# Altium PCB PCB2.PcbDoc
Units mm, origin at the board's own origin, x right, y up, seen from the top; angles counter-clockwise.
Board outline 29 x 14 mm, 2 copper layers (Top Layer, Bottom Layer), stack 1.569 mm thick; 11 components, 6 nets, 26 pads, 8 vias.
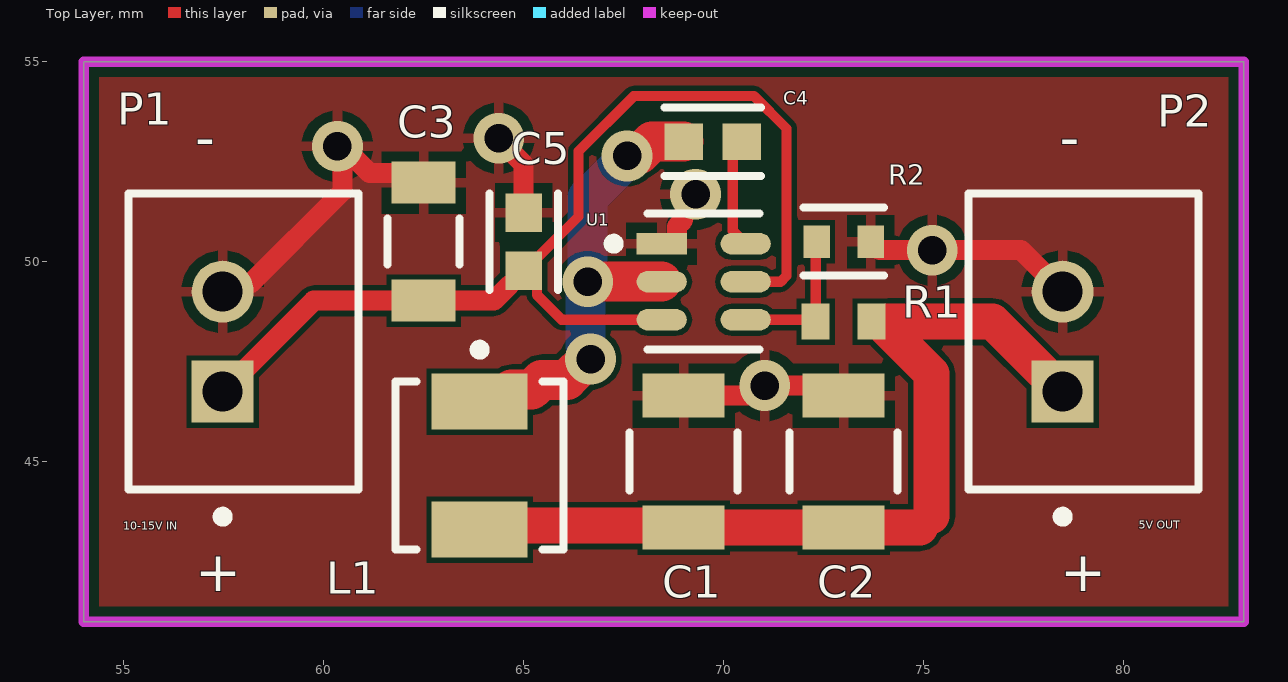
[diagram p0: Top Layer view]
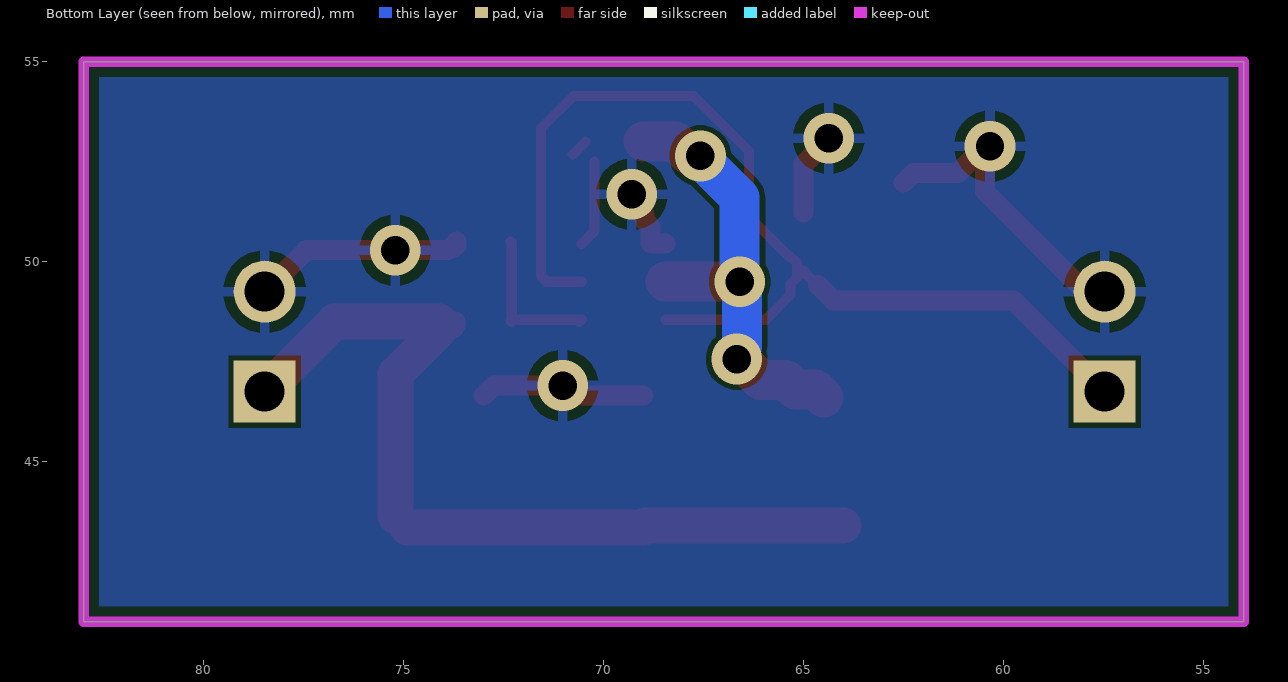
[diagram p1: Bottom Layer view, seen from below]
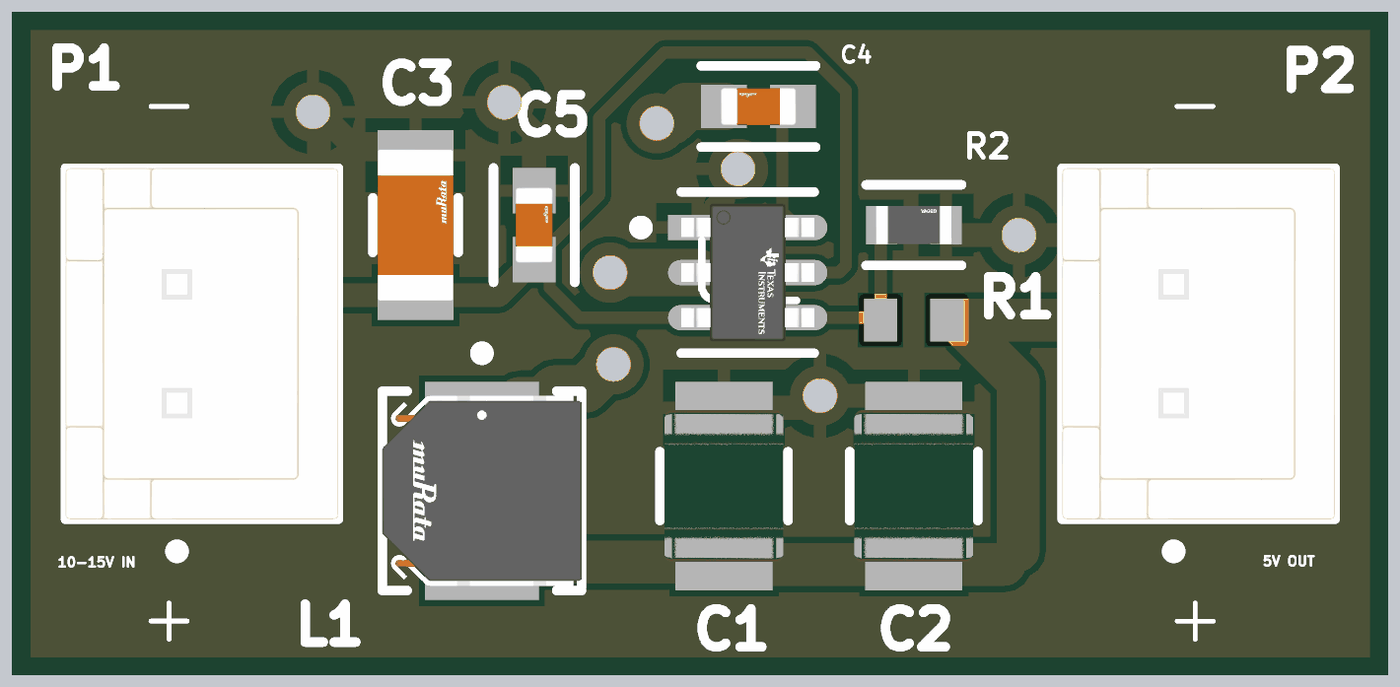
[diagram p2: 3D render of the assembled board from above, using the file's embedded part models]

## Layer stack, top to bottom
Top Solder: solder mask 0.0254, SM-001, Dk 4
Top Layer: signal copper 0.035
Dielectric 1: core 1.4986, Core-043, Dk 4.3
Bottom Layer: signal copper 0.035
Bottom Solder: solder mask 0.0254, SM-001, Dk 4

## Board outline
54,41 54,55 83,55 83,41

## Design rules (kind name [scope] priority, off if disabled: settings)
AssemblyTestPointUsage [All] p1: isadvanced=TRUE
AssemblyTestpoint [All] p1: isadvanced=TRUE testpointundercomponent=TRUE minsize=1.016 maxsize=2.54 preferedsize=1.524 minholesize=0 maxholesize=1.016 preferedholesize=0.813 testpointgrid=0.025 usegrid=TRUE gridtolerance=0 allowsidetop=TRUE allowsidebottom=TRUE
Clearance Clearance_1 [OnMid vs OnMid] p1: gap=0.127 ignorepadtopadclearanceinfootprint=FALSE sourcerule=41 cellrowname=All cellrowtype=0 cellcolname=All cellcoltype=0 innerlayers=TRUE
Clearance Clearance_2 [(ExistsOnLayer('Top Layer') Or ExistsOnLayer('Bottom Layer')) vs (ExistsOnLayer('Top Layer') Or ExistsOnLayer('Bottom Layer'))] p2: gap=0.127 ignorepadtopadclearanceinfootprint=FALSE sourcerule=41 cellrowname=All cellrowtype=0 cellcolname=All cellcoltype=0 outerlayers=TRUE
Clearance [All] p3: gap=0.254 ignorepadtopadclearanceinfootprint=FALSE ismatrix=TRUE
ComponentClearance [All] p1: isadvanced=TRUE gap=0.254 collisioncheckmode=3 verticalgap=0.254 showdistances=FALSE
FabricationTestPointUsage [All] p1: isadvanced=TRUE valid=0 allowmultiple=FALSE
FabricationTestpoint [All] p1: isadvanced=TRUE side=3 testpointundercomponent=TRUE minsize=1.016 maxsize=2.54 preferedsize=1.524 minholesize=0 maxholesize=1.016 preferedholesize=0.813 testpointgrid=0.025 allowsidetop=TRUE allowsidebottom=TRUE usegrid=TRUE gridtolerance=0
FanoutControl Fanout_BGA [IsBGA] p1: isadvanced=TRUE bgadir=Out bgaviamode=Centered fanoutstyle=Auto fanoutdirection=Alternating viagrid=0.025 // Fanout_BGA (Default Rule)
FanoutControl Fanout_LCC [IsLCC] p2: isadvanced=TRUE bgadir=Out bgaviamode=Centered fanoutstyle=Auto fanoutdirection=Alternating viagrid=0.025 // Fanout_LCC (Default Rule)
FanoutControl Fanout_SOIC [IsSOIC] p3: isadvanced=TRUE bgadir=Out bgaviamode=Centered fanoutstyle=Auto fanoutdirection=Alternating viagrid=0.025 // Fanout_SOIC (Default Rule)
FanoutControl Fanout_Small [(CompPinCount < 5)] p4: isadvanced=TRUE bgadir=Out bgaviamode=Centered fanoutstyle=Auto fanoutdirection=OutThenIn viagrid=0.025 // Fanout_Small (Default Rule)
FanoutControl Fanout_Default [All] p5: isadvanced=TRUE bgadir=Out bgaviamode=Centered fanoutstyle=Auto fanoutdirection=Alternating viagrid=0.025 // Fanout_Default (Default Rule)
Height [All] p1: isadvanced=TRUE minheight=0 maxheight=25.4 prefheight=12.7
HoleSize [All] p1: isadvanced=TRUE absolutevalues=TRUE maxlimit=2.54 minlimit=0.025 maxpercent=80.000 minpercent=20.000
HoleToHoleClearance [All] p1: isadvanced=TRUE gap=0.254 allowstackedmicrovias=TRUE
LayerPairs [All] p1: isadvanced=TRUE enforce=TRUE
MinimumSolderMaskSliver [All] p1: isadvanced=TRUE minsoldermaskwidth=0.254
NetAntennae [All] p1: isadvanced=TRUE netantennaetolerance=0
PasteMaskExpansion [All] p1: isadvanced=TRUE expansion=0
PlaneClearance [All] p1: isadvanced=TRUE clearance=0.508
PlaneConnect [All] p1: isadvanced=TRUE planeconnectstyle=Relief reliefexpansion=0.508 reliefentries=4 reliefconductorwidth=0.254 reliefairgap=0.254
PolygonConnect [All] p1: connectstyle=Relief reliefconductorwidth=0.254 reliefentries=4 polygonreliefangle="90 Angle" airgapwidth=0.254
RoutingCorners [All] p1: isadvanced=TRUE cornerstyle=45-Degree minsetback=2.54 maxsetback=2.54
RoutingPriority [All] p1: isadvanced=TRUE routingpriority=0
RoutingVias [All] p1: holewidth=0.711 width=1.27 viastyle="Through Hole" minholewidth=0.711 minwidth=1.27 maxholewidth=0.711 maxwidth=1.27
ShortCircuit [All] p1: isadvanced=TRUE allowed=FALSE
SilkToSilkClearance [All] p1: isadvanced=TRUE silktosilkclearance=0.254
SilkToSolderMaskClearance [IsPad] p1: isadvanced=TRUE minsilkscreentomaskgap=0.254 clearancetoexposedcopper=TRUE
SolderMaskExpansion [All] p1: isadvanced=TRUE expansion=0.102 istentingtop=FALSE
SupplyNets "Schematic Supply Nets" [InNet('GND')] p1: isadvanced=TRUE voltage=0.000
UnRoutedNet [All] p1: isadvanced=TRUE
UnpouredPolygon [All] p1: isadvanced=TRUE
Width MaxMinWidth_1 [InNet('VIN')] p1: maxlimit=0.5 minlimit=0.254 preferedwidth=0.5 minimp=50.000000 maximp=50.000000 favimp=50.000000
Width MaxMinWidth_2 [InNet('SW')] p2: maxlimit=1 minlimit=0.254 preferedwidth=1 minimp=50.000000 maximp=50.000000 favimp=50.000000
Width MaxMinWidth_3 [InNet('VOUT')] p3: maxlimit=1 minlimit=0.254 preferedwidth=1 minimp=50.000000 maximp=50.000000 favimp=50.000000
Width MaxMinWidth_4 [InNet('GND')] p4: maxlimit=0.5 minlimit=0.5 preferedwidth=0.5 minimp=50.000000 maximp=50.000000 favimp=50.000000
Width [All] p5: maxlimit=0.254 minlimit=0.254 preferedwidth=0.254
4 further rules are at their usual default settings.

## Classes and differential pairs
component class Sheet1: C1 C2 C3 C4 C5 L1 P1 P2 R1 R2

## Components (designator, comment, footprint, x,y, rotation, side; value= is the part's Value field where it differs from the comment)
C1 "GRM32ER61E226KE15L" FP-GRM32-MFG 69,45 r270 top value=22uF
C2 "GRM32ER61E226KE15L" FP-GRM32-MFG 73,45 r270 top value=22uF
C3 "GRM31CR71E106KA12K" FP-GRM31C-0_2-e0_3_0_8-MFG 62.5,50.5 r90 top
C4 "GRM188R72A104KA35D" FP-GRM188-0_1-e0_2_0_5-IPC_B 69.727,53 r180 top
C5 "GRM188R72A104KA35D" FP-GRM188-0_1-e0_2_0_5-IPC_B 65,50.5 r90 top
L1 "FDSD0420-H-4R7M=P3" FP-FDSD0420-MFG 63.9,44.9 r270 top
P1 "B2B-XH-A(LF)(SN)" FP-B2B-XH-A_LF_SN-MFG 58,48 r90 top
P2 "B2B-XH-A(LF)(SN)" FP-B2B-XH-A_LF_SN-MFG 79,48 r90 top
R1 "RC0603FR-0754K9L" RESC1608X55X25NL10T15 73,48.5 r0 top
R2 "RC0603FR-0710KL" FP-RC0603-0_55-IPC_C 73,50.5 r0 top
U1 "TPS562201DDCR" FP-DDC0006A-IPC_C 69.5,49.5 r0 top

## Footprints (in the part's own frame and the unit in brackets; to place one, negate y for a bottom-side part, rotate by r counter-clockwise, add the part's x,y. Pads: shape width x height; smd on the part's side, far side on the other; paste and mask are expansions set on the pad)
FP-B2B-XH-A_LF_SN-MFG [mm]
  rect 1.55x1.55 hole 1 paste-2539.97 mask+0: 1(-1.25,0.525)
  round 1.55 hole 1 paste-2539.97 mask+0: 2(1.25,0.525)
  silkscreen extent -4.5,-2.88 3.7,2.88, body extent -3.8,-2.98 3.8,2.98, height 0.25
FP-DDC0006A-IPC_C [mm]
  rect 1.254x0.532 smd paste+0 mask+0: 1(-1.05,0.95)
  rrect100% 1.254x0.532 smd paste+0 mask+0: 2(-1.05,0) 3(-1.05,-0.95) 4(1.05,-0.95) 5(1.05,0) 6(1.05,0.95)
  silkscreen extent -2.37,-1.7 1.4,1.7, body extent -1.78,-1.55 1.78,1.55, height 0.25
FP-FDSD0420-MFG [mm]
  rect 1.4x2.4 smd paste+0 mask+0: 1(-1.6,0) 2(1.6,0)
  silkscreen extent -3.02,-2.1 2.1,2.1, body extent -2.4,-2.2 2.4,2.2, height 0.25
FP-GRM31C-0_2-e0_3_0_8-MFG [mm]
  rect 1.05x1.6 smd paste+0 mask+0: 1(-1.475,0) 2(1.475,0)
  silkscreen extent -0.58,-0.9 0.58,0.9, body extent -2.1,-1 2.1,1, height 0.25
FP-GRM32-MFG [mm]
  rect 1.1x2.05 smd paste+0 mask+0: 1(-1.65,0) 2(1.65,0)
  silkscreen extent -0.72,-1.35 0.72,1.35, body extent -2.3,-1.45 2.3,1.45, height 0.25
FP-GRM188-0_1-e0_2_0_5-IPC_B [mm]
  rect 0.959x0.912 smd paste+0 mask+0: 1(-0.727,0) 2(0.727,0)
  silkscreen extent -1.21,-0.86 1.21,0.86, body extent -1.46,-0.71 1.46,0.71, height 0.25
FP-RC0603-0_55-IPC_C [mm]
  rect 0.659x0.812 smd paste+0 mask+0: 1(-0.677,0) 2(0.677,0)
  silkscreen extent -1.01,-0.85 1.01,0.85, body extent -1.11,-0.55 1.11,0.55, height 0.25
RESC1608X55X25NL10T15 [mm] "Chip Resistor, 2-Leads, Body 1.60x0.80mm, IPC Medium Density"
  rect 0.7x0.9 smd: 1(-0.7,0) 2(0.7,0)
  body extent -0.85,-0.45 0.85,0.45, height 0.55

## Part data
C1 C2: library part CMP-2000-05458-2, "CAP CER 22UF 25V X5R 1210", Capacitance=22uF, Manufacturer="Murata Electronics North America", Operating Temperature="-55°C ~ 85°C", Package=GRM32, Package / Case="1210 (3225 Metric)", Standard Package=1,000, Temperature="-55°C to +85°C", Temperature Characteristic=X5R, Temperature Range High=+85°C, Temperature Range Low=-55°C, Tolerance=10%, Voltage - Rated=25V, Applications="General Purpose", Automotive=No, Category=Cap, ComponentLink2Description=Datasheet, ComponentLink2URL=https://search.murata.co.jp/Ceramy/image/img/A01X/G101/ENG/GRM32ER61E226KE15-01A.pdf, Device Class L1="Passive Components", Device Class L2=Capacitors, Device Class L3="Ceramic Capacitors", Digikey Description="CAP CER 22UF 25V X5R 1210", Height=2.7mm, Lead Free=Yes, Manufacturer Part Number=GRM32ER61E226KE15L, Material=Ceramic, Mounting Type="Surface Mount, MLCC", Mouser Description="Multilayer Ceramic Capacitors MLCC - SMD/SMT 1210 22uF 25volts X5R 10%", Octopart=https://octopart.com/grm32er61e226ke15l-murata-197441, Other Names=490-3889-2, Packaging="Cut Tape (CT)", Possible Substitute=GRM32ER61E226KE15K, RoHS=TRUE, Size / Dimension="0.126\" L x 0.098\" W (3.20mm x 2.50mm)", Temperature Coefficient=X5R, Thickness (Max)="0.106\" (2.70mm)", Voltage Rating=25V
C3: library part CMP-06035-005515-1, "Chip Multilayer Ceramic Capacitors for General Purpose, 1206, 10uF, X7R, 15%, 10%, 25V", Capacitance=10uF, Case/Package=1206, Dielectric=X7R, Max Operating Temperature=125°C, Min Operating Temperature=-55°C, Tolerance=10%, Voltage=25V, Lead Free="Lead Free", Length=0.126inch, Mount="Surface Mount", Packaging="Tape and Reel", Thickness=0.071inch, Voltage Rating=25V, Voltage Rating (DC)=25V, Width=0.063inch
C4 C5: library part CMP-1035-02595-8, "Chip Multilayer Ceramic Capacitors for General Purpose, 0603, 0.10uF, X7R, 15%, 10%, 100V", Capacitance=100nF, Case Code (Imperial)=0603, Case Code (Metric)=1608, Dielectric=X7R, Max Operating Temperature=125°C, Min Operating Temperature=-55°C, Package Quantity=1, Tolerance=10%, Voltage=100V, Case/Package=0603, Depth=0.8mm, Height=0.8mm, Lead Free="Lead Free", Length=1.6mm, Material=Ceramic, Mount="Surface Mount", Packaging="Tape and Reel", Radiation Hardening=No, REACH SVHC="No SVHC", Termination=SMD/SMT, Thickness=0.035inch, Voltage Rating=100V, Voltage Rating (DC)=100V, Weight=0.000222oz, Width=0.8mm
L1: library part CMP-06042-016333-1, "FIXED IND 4.7UH 2.7A 83 MOHM SMD", Case/Package=Nonstandard, Current Rating=2.7A, DC Resistance (DCR)=83mR, Inductance=4.7uH, Resistor Type=Wirewound, Saturation Current=3.6A, Test Frequency=100kHz, Tolerance=20%, Core Material=Ferrite, Height - Seated (Max)=0.078inch, Length=0.165inch, Max DC Current=2.7A, Mount="Surface Mount", Packaging="Tape and Reel", RoHS Compliant=Yes, Shielding=Shielded, Width=0.165inch
P1 P2: library part CMP-2000-05888-3, "CONN HEADER VERT 2POS 2.5MM", Color=Natural, Contact Resistance=20mR, Current Rating=3A, Housing Color=White, Insulation Resistance=1GR, Max Operating Temperature=85°C, Max Voltage Rating (AC)=250V, Min Operating Temperature=-25°C, Connector Type="Male Pin", Contact Material=Brass, Contact Plating=Tin, Contact Type="Male Pin", Depth=5.75mm, Fastening Type=Detent, Housing Material=Polyamide, Lead Free="Lead Free", Lead Pitch=2.5mm, Length=7.4mm, Max Current Rating=3A, Max Voltage Rating (DC)=250V, Mount="Through Hole", Number of Contacts=2, Number of Positions=2, Number of Rows=1, Orientation=Straight, Packaging=Bulk, Pitch=2.5mm, REACH SVHC="No SVHC", Series=XH, Termination=Solder, Voltage Rating=250V, Voltage Rating (AC)=250V, Wire/Cable Gauge=22AWG
R1: library part CMP-2000-04083-1, Manufacturer=Yageo, Part Number=RC0603FR-0754K9L
R2: library part CMP-2100-03664-2, "RES 10K OHM 1% 1/10W 0603", Case Code (Imperial)=0603, Case Code (Metric)=1608, Max Operating Temperature=155°C, Max Power Dissipation=100mW, Min Operating Temperature=-55°C, Resistance=10kR, Resistance Tolerance=1%, Resistor Type="Thick Film", Temperature Coefficient=100ppm/°C, Voltage Rating=75V, Voltage Rating (DC)=50V, Case/Package=0603, Construction=Rectangular, Depth=0.8mm, Features="Moisture Resistant", Height=0.45mm, Lead Free="Lead Free", Lead Pitch=0.3mm, Length=1.6mm, Military Standard=Not, Number of Pins=2, Number of Terminations=2, Packaging="Tape and Reel", Power Rating=100mW, RoHS Compliant=Yes, Series=RC, Size Code=0603, Termination=SMD/SMT, Tolerance=1%, Weight=7.1E-05oz, Width=0.8mm
U1: library part CMP-031-00006-1, "Buck Yes 580KHz Adjustable 1 7V 768mV 17V 4.5V SOT-23-THIN SMD mount 1.1mm(height)", Case/Package=SOT, Max Operating Temperature=125°C, Max Supply Voltage=17V, Min Operating Temperature=-40°C, Min Supply Voltage=4.5V, Mounting Technology="Surface Mount", Pins=6

## Via types
v1: diameter 1.27, hole 0.712, Top Layer to Bottom Layer, tented both sides, 7 vias
v2: diameter 1.27, hole 0.711, Top Layer to Bottom Layer, tented both sides, 1 vias

## Nets (pads, with @x,y where several pads share a name; then routed paths per layer and width w, separated by ;. In a path a pad name is that pad's centre, name@x,y a point inside that pad or via, vN(x,y) a via of type N, cw(c..) or ccw(c..) an arc to the next point about the centre after c; other vN are vias at no path point)
GND: C1.1 C2.1 C3.2 C5.2 P1.2 P2.2 R2.2 U1.1 | length 21.2
  Top Layer w0.5: P1.2 57.676,49.451 58.164,49.451 60.47,51.757 60.47,52.76 v1(60.343,52.887) 60.475,52.887 61.148,52.215 62.26,52.215 C3.2 ; v1(64.374,53.088) 64.374,53.065 65,52.439 C5.2 ; U1.1 68.811,50.45 68.827,50.466 68.827,50.88 68.985,51.038 68.985,51.165 69.297,51.477 v1(69.297,51.685) ; C1.1 70.772,46.65 v1(71.026,46.904) 72.746,46.904 C2.1 ; R2.2 73.677,50.423 73.756,50.344 73.833,50.344 73.889,50.287 v1(75.213,50.287) 77.438,50.287 P2.2
SW: C4.2 L1.1 U1.2 | length 11.5
  Top Layer w1: L1.1@64.5,46.6 64.7,46.8 65.2,46.8 65.446,47.046 66.08,47.046 66.6,47.566 v1(66.673,47.566) ; v2(66.6,49.5) U1.2 ; v1(67.584,52.645) 67.636,52.696 67.899,52.696 68.202,53 C4.2
  Bottom Layer w1: v1(66.673,47.566) 66.621,47.617 66.621,47.808 66.548,47.881 66.548,49.448 v2(66.6,49.5) 66.6,51.6 67.584,52.584 v1(67.584,52.645)
VBST: C4.1 U1.6 | length 2.6
  Top Layer w0.254: 70.227,52.5 70.227,50.774 U1.6 ; C4.1 C4.1@70.777,52.676
VFB: R1.1 R2.1 U1.4 | length 3.9
  Top Layer w0.254: U1.4@70.6,48.5 U1.4 72.25,48.55 R1.1 ; R1.1@72.323,48.523 R1.1 ; R2.1 72.3,50.477 R1.1
VIN: C3.1 C5.1 P1.1 U1.3 U1.5 | length 27.7
  Top Layer w0.254: P1.1 P1.1@57.75,46.75 ; C5.1@64.648,49.421 64.671,49.421 65,49.75 C5.1 C5.1@65.165,49.609 ; U1.3 65.95,48.55 65.329,49.171 65.329,49.444 C5.1@65.165,49.609 ; U1.5 71.422,49.5 71.571,49.649 71.571,53.331 70.761,54.141 67.75,54.141 66.37,52.76 66.37,51.132 65.363,50.126 65.329,50.126 65.165,49.961 C5.1@65.165,49.609
  Top Layer w0.5: P1.1 59.75,49.025 C3.1 64.252,49.025 C5.1@64.648,49.421
VOUT: C1.2 C2.2 L1.2 P2.1 R1.2 | length 22.4
  Top Layer w0.5: C1.2@68.95,43.4 C1.2 ; R1.2@73.7,48.4 73.8,48.3 74.1,48.3 ; R1.2 73.9,48.5 74.1,48.5 ; 74.907,43.35 75.2,43.643
  Top Layer w0.9: L1.2@64,43.4 C1.2@68.95,43.4 ; C1.2 C2.2 74.907,43.35 ; 74.1,48.3 75.2,47.2 75.2,43.643 ; 74.1,48.5 76.725,48.5 P2.1

## Polygon pours and split planes (outlines as drawn)
GND on Bottom Layer "GND Layer" (solid, remove dead copper, pour order 1): 54,55 83,55 83,41 54,41
GND on Top Layer "GND Layer" (solid, remove dead copper, pour order 0): 54.076,54.971 83.076,54.971 83.076,40.971 54.076,40.971

## Keep-outs
Keep-Out Layer:
  lines w0.254: 83,55 83,41 82,41 55,41 54,41 54,55 55,55 82,55 83,55 ; 83,55 83,55

## Silkscreen, mask and mechanical layers (free items; w line width, h text height)
Top Overlay:
  text "-" at 56.789,52.614 h1
  text "-" at 78.407,52.614 h1
  text "5V OUT" at 80.377,43.323 h0.2
  text "10-15V IN" at 54.984,43.3 h0.2
  text "+" at 56.789,41.766 h1
  text "+" at 78.411,41.766 h1